# Altium PCB AC_board.PcbDoc (part 1 of 4)
Units mil, origin at the board's own origin, x right, y up, seen from the top; angles counter-clockwise.
Board outline 6299.21 x 4130.86 mil, 4 copper layers (Top Layer, Layer 1, Layer 2, Bottom Layer), stack 31.891 mil thick; 48 components, 40 nets, 187 pads, 6431 vias.
Unrouted connection lines stored in the file: 10.
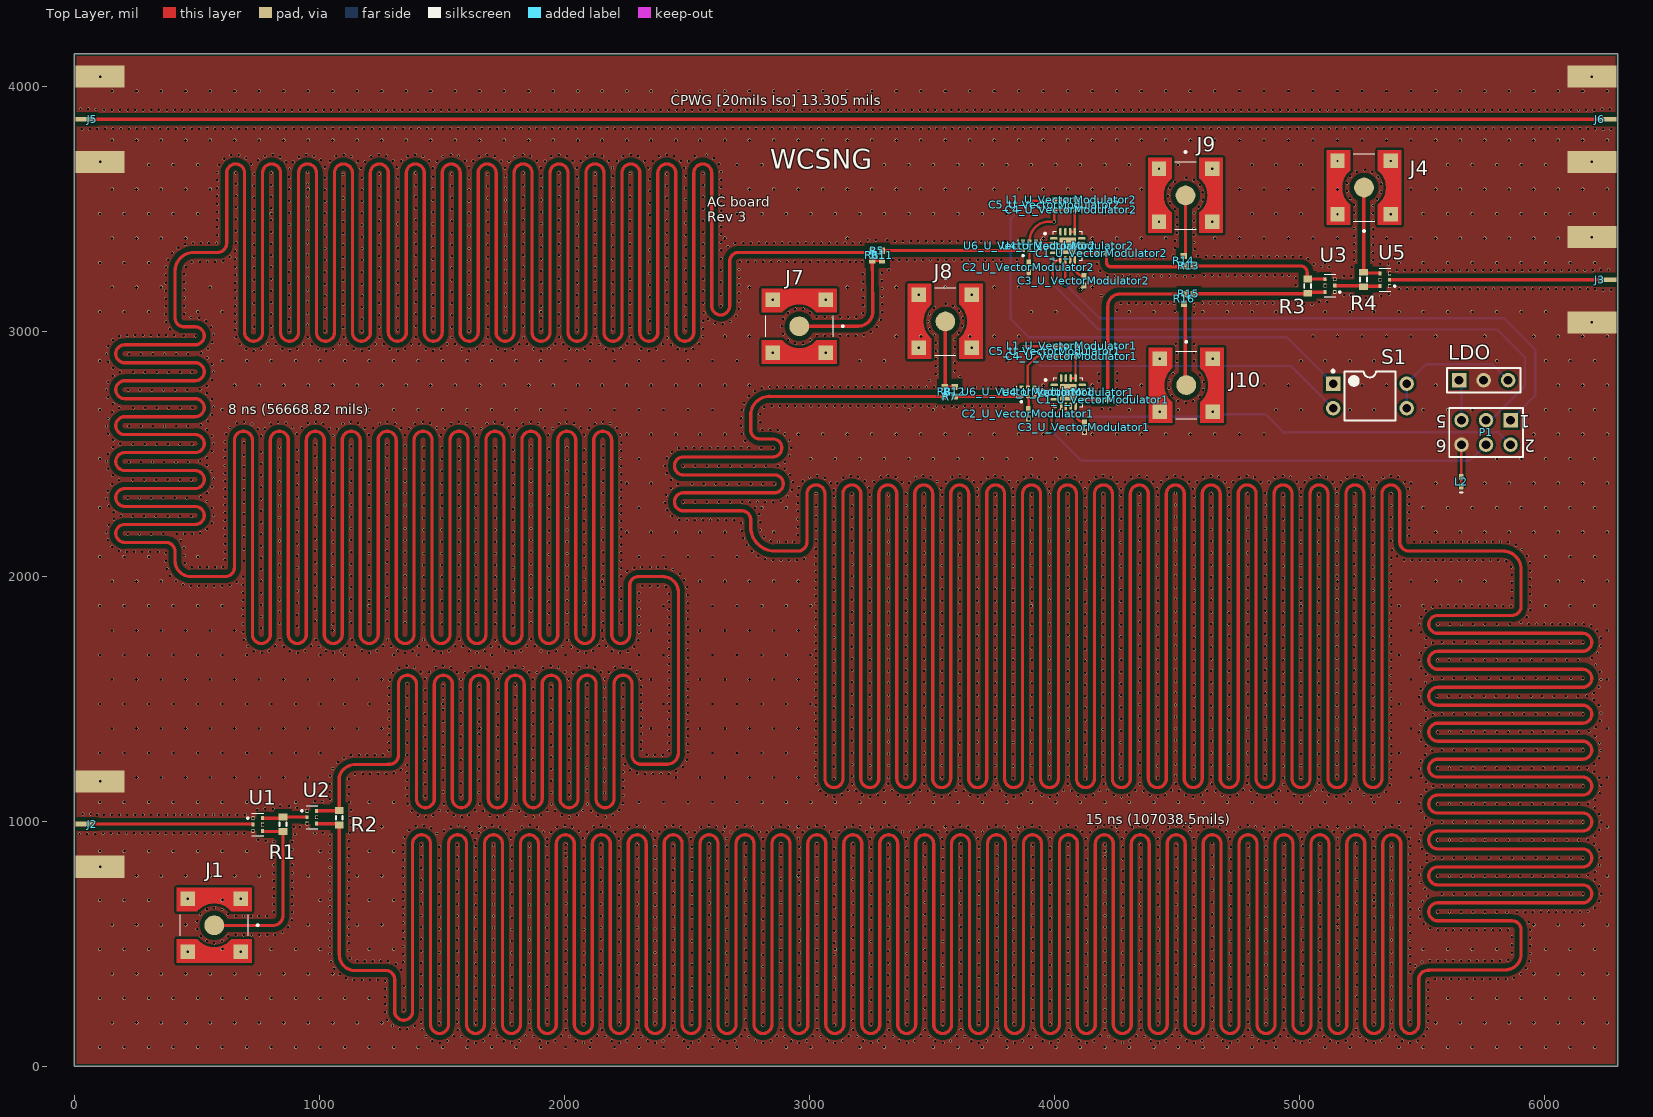
[diagram p0: Top Layer view]
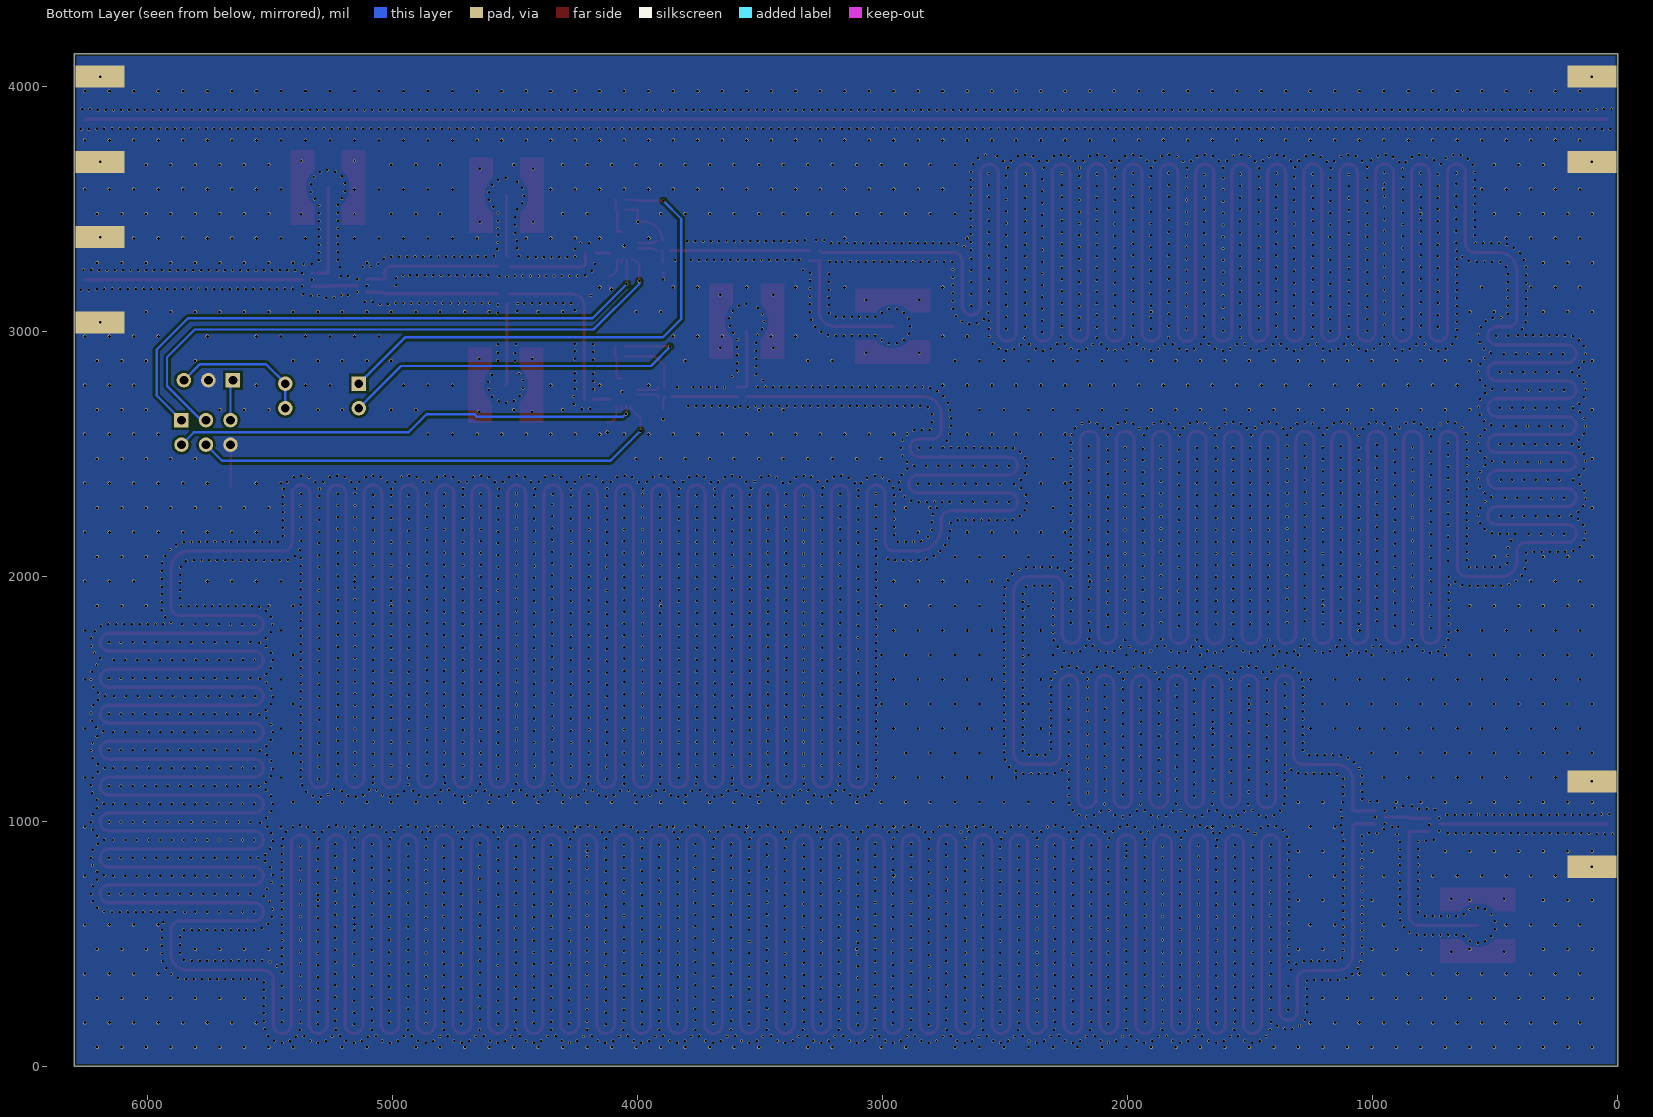
[diagram p1: Bottom Layer view, seen from below]
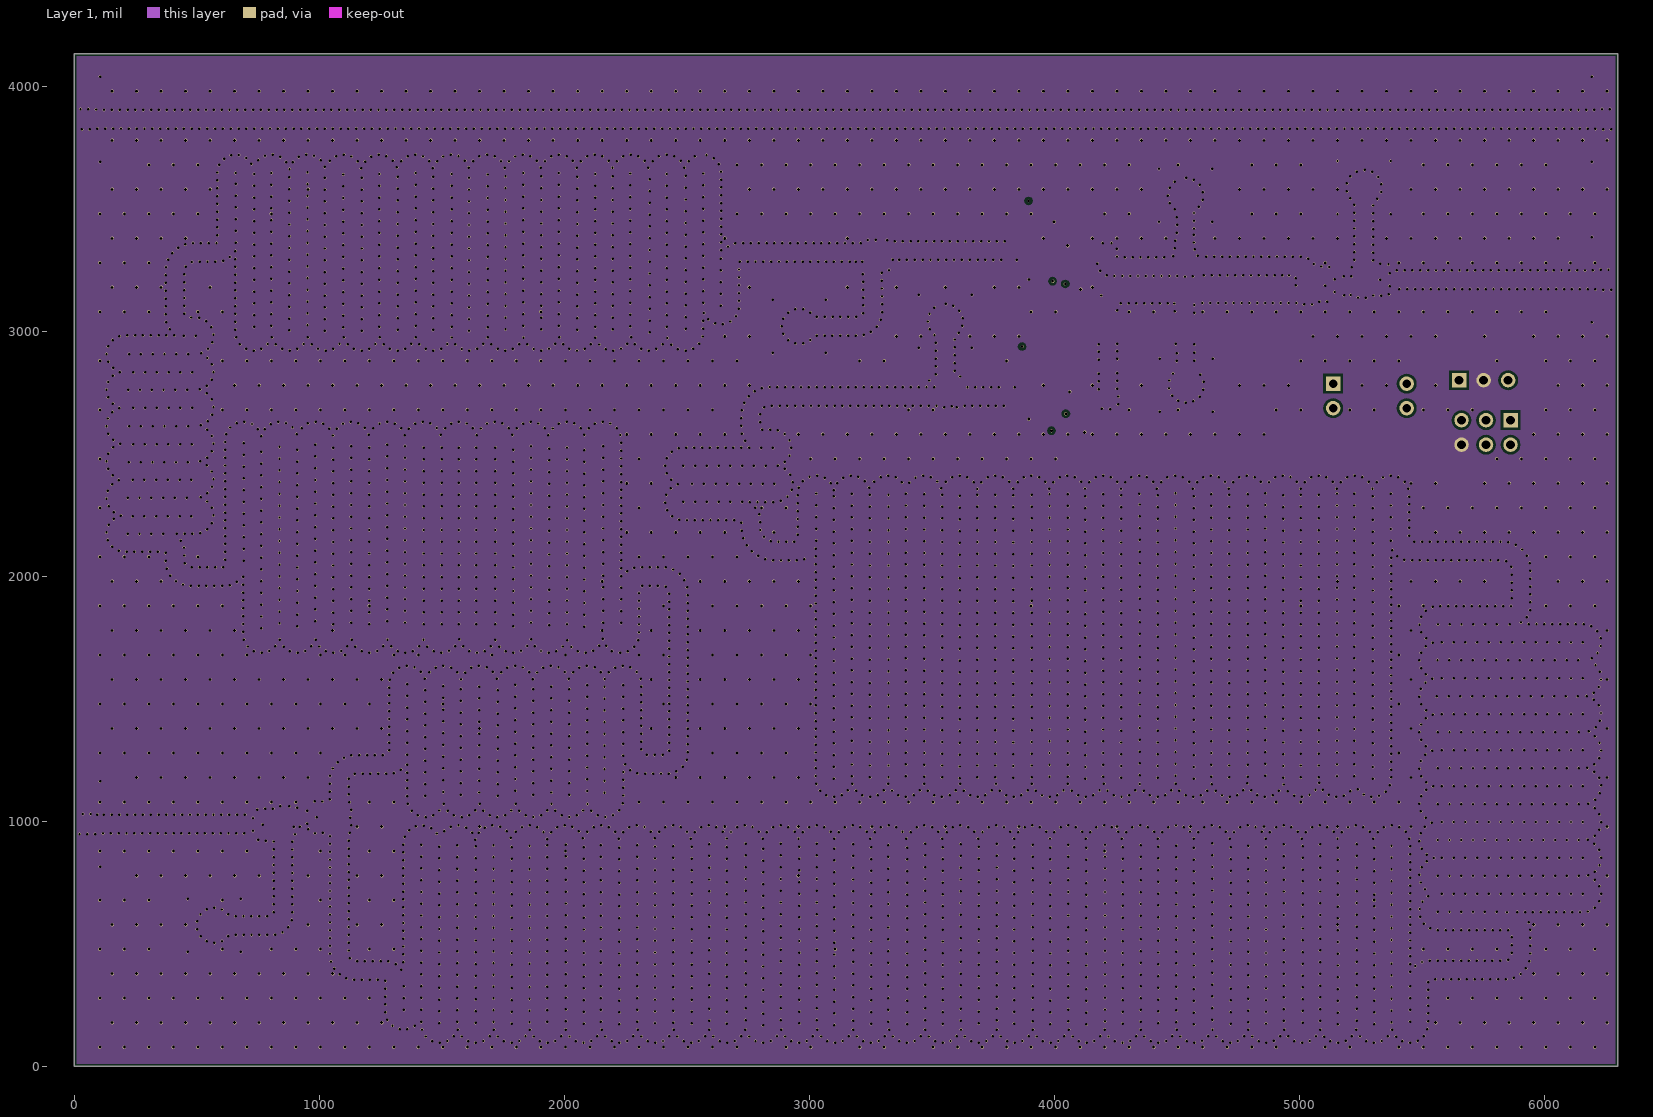
[diagram p2: Layer 1]
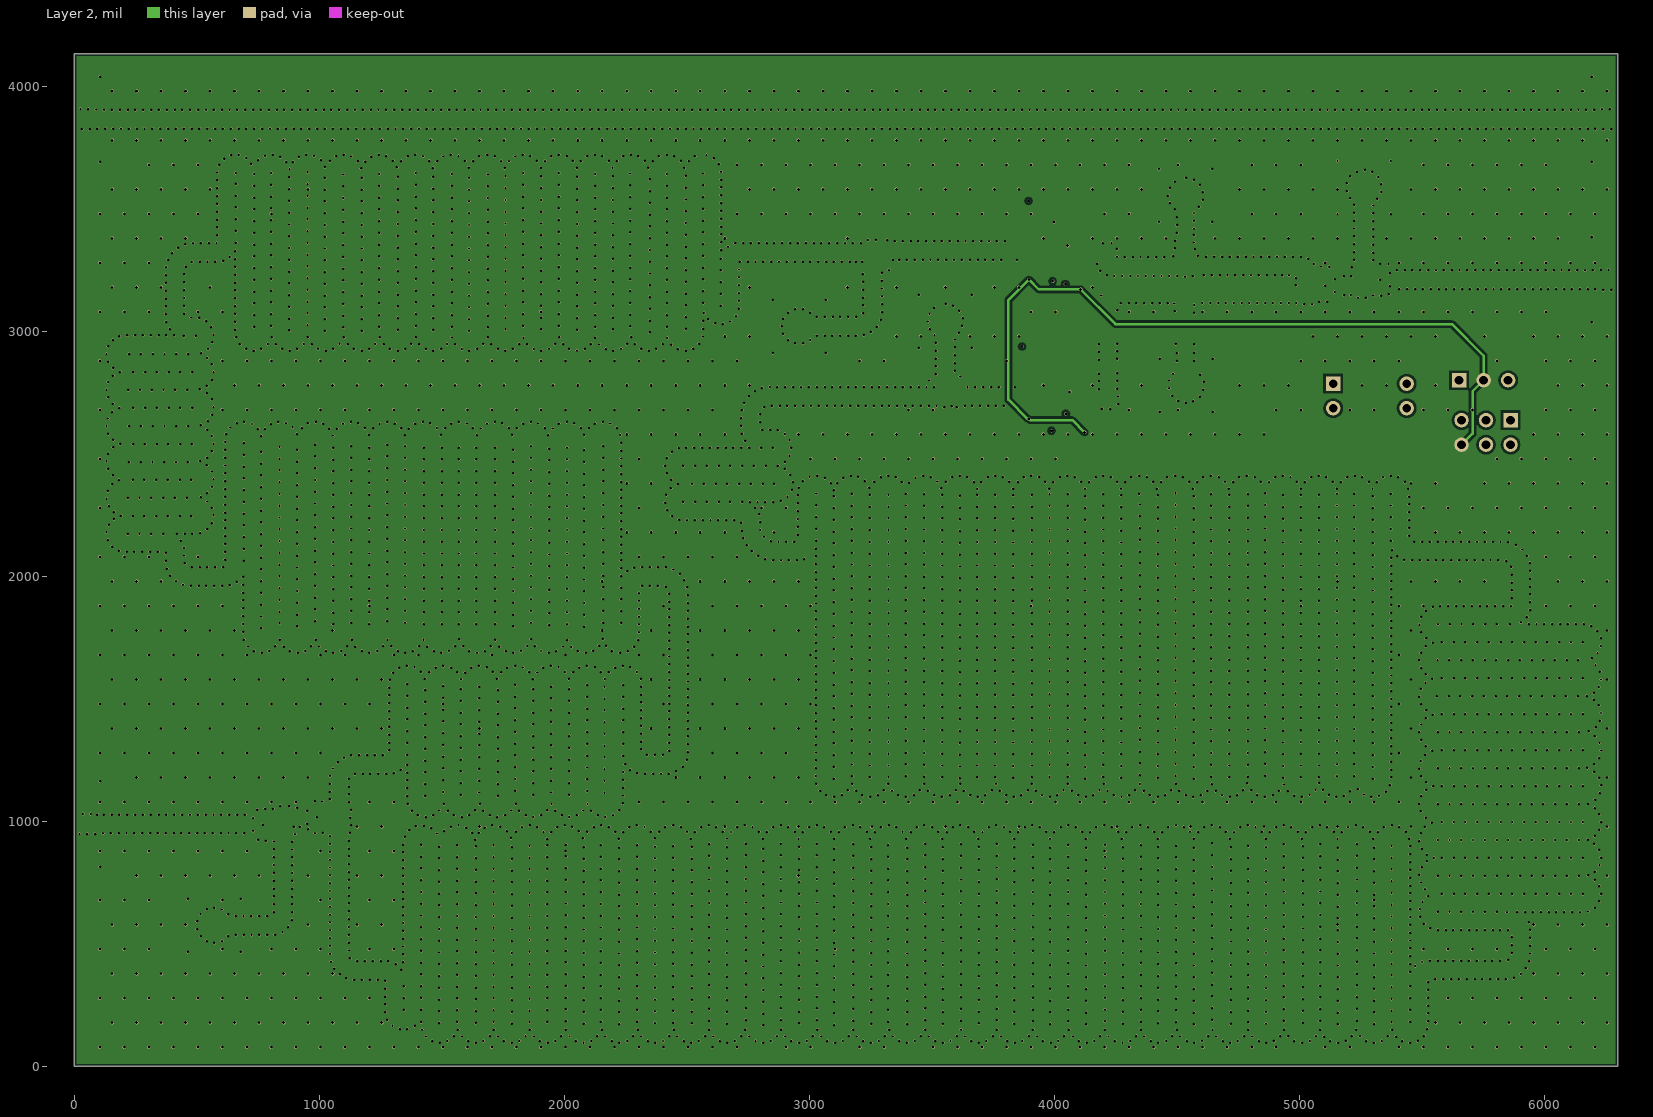
[diagram p3: Layer 2]

## Layer stack, top to bottom
Top Solder: solder mask 0.4, Solder Resist, Dk 3.5
Top Layer: signal copper 1.3778
Isola 408HR-1: prepreg 6.8898, FR4, Dk 3.64
Layer 1: signal copper 1.3778
Isola 408HR-Core: dielectric 12.6, FR-4, Dk 3.64
Layer 2: signal copper 1.3778
Isola 408HR-2: prepreg 6.8898, FR4, Dk 3.64
Bottom Layer: signal copper 1.3778
Bottom Solder: solder mask 0.4, Solder Resist, Dk 3.5

## Board outline
0,3 6299.21,3 6299.21,4133.86 0,4133.86

## Design rules (kind name [scope] priority, off if disabled: settings)
BoardOutlineClearance [All] p1: gap=10 ignorepadtopadclearanceinfootprint=FALSE
Clearance "Schematic Clearance Constraint" [InNetClass('RF Nets')] p1: gap=20 ignorepadtopadclearanceinfootprint=FALSE except(3: Arc-SMDPad Track-SMDPad SMDPad-SMDPad)
Clearance "Schematic Clearance Constraint_1" [InNetClass('HMC RF IN')] p2: gap=5 ignorepadtopadclearanceinfootprint=FALSE
Clearance "HMC RF IN Clearance" [InNetClass('HMC RF IN')] p3: gap=4.07 ignorepadtopadclearanceinfootprint=FALSE
Clearance [All] p4: gap=10 ignorepadtopadclearanceinfootprint=FALSE except(0: Arc-Hole Track-Hole SMDPad-Hole THPad-Hole Via-Hole Fill-Hole Poly-Hole Region-Hole Text-Hole; 6: Arc-Arc Arc-Track Arc-SMDPad Track-Track Track-SMDPad SMDPad-SMDPad)
Clearance "RF Clearance" [InNetClass('RF Nets')] p5: gap=10 ignorepadtopadclearanceinfootprint=FALSE
Length "Tap 2 Length" [InNet('No Net') And OnLayer('Top Layer')] p1: maxlimit=38652.77 minlimit=38652.77
Length "Tap 1 Length" [InNet('No Net') And OnLayer('Top Layer')] p2: maxlimit=24911.29 minlimit=24911.29
MatchedLengths [InNetClass('Taps')] p1: tolerance=0 checknetsindiffpair=FALSE checkdiffpairvsdiffpair=TRUE checkxsignals=TRUE checkothers=TRUE
MinimumSolderMaskSliver [All] p1: minsoldermaskwidth=0
PlaneConnect [All] p1: planeconnectstyle=Direct reliefexpansion=20 reliefentries=4 reliefconductorwidth=10 reliefairgap=10
PolygonConnect [All] p1: connectstyle=Direct reliefconductorwidth=10 reliefentries=4 polygonreliefangle="90 Angle" airgapwidth=10
RoomDefinition U_VectorModulator1 [InComponentClass('U_VectorModulator1')] p1: confinementstyle=ConfineIn formatcopy=TRUE lockcomponents=FALSE outline 3793.26,2541.83 4258.65,2541.83 4258.65,2987.83 3793.26,2987.83
RoomDefinition U_VectorModulator2 [InComponentClass('U_VectorModulator2')] p2: confinementstyle=ConfineIn formatcopy=TRUE lockcomponents=FALSE outline 3819.06,3158.2 4249.06,3158.2 4249.06,3583.2 3819.06,3583.2
RoutingVias [All] p1: holewidth=12 width=14 viastyle="Through Hole" minholewidth=8 minwidth=10 maxholewidth=17 maxwidth=20
ShortCircuit [All] p1: allowed=TRUE
SilkToSolderMaskClearance [IsPad] p1: minsilkscreentomaskgap=5 clearancetoexposedcopper=TRUE
SolderMaskExpansion [All] p1: expansion=4 istentingtop=FALSE
Width "Schematic Width Constraint_1" [InNetClass('RF Nets')] p1: maxlimit=13.3 minlimit=13.3 preferedwidth=13.3
Width "Schematic Width Constraint" [InNetClass('HMC RF IN')] p2: maxlimit=10 minlimit=10 preferedwidth=10
Width "HMC RF IN Width" [InNetClass('HMC RF IN')] p3: maxlimit=10 minlimit=10 preferedwidth=10
Width "RF Width" [InNetClass('RF Nets')] p4: maxlimit=13.3 minlimit=13.3 preferedwidth=13.31
Width [All] p5: maxlimit=10 minlimit=10 preferedwidth=10
26 further rules are at their usual default settings.

## Classes and differential pairs
net class "HMC RF IN": HMCIN_U_VectorModulator1 HMCIN_U_VectorModulator2 HMCINbar_U_VectorModulator1 HMCINbar_U_VectorModulator2
net class "RF Nets": B-IP B-OP NetC1_U_VectorModulator1_1 NetC1_U_VectorModulator2_1 NetJ5_SIG NetJ7_C NetJ8_C RF-C1 RF-C1-1 RF-C1-2 RF-C2-1 RF-C2-2 RF-J9 RF-J10 RF-S1 RF-S2-1 RF-S2-2 RF-S3-1 RF-S3-2 RXin TXout
channel class VectorModulator: U_VectorModulator1 U_VectorModulator2
component class U_VectorModulator2: C1_U_VectorModulator2 C2_U_VectorModulator2 C3_U_VectorModulator2 C4_U_VectorModulator2 C5_U_VectorModulator2 L1_U_VectorModulator2 U4_U_VectorModulator2 U6_U_VectorModulator2
component class U_VectorModulator1: C1_U_VectorModulator1 C2_U_VectorModulator1 C3_U_VectorModulator1 C4_U_VectorModulator1 C5_U_VectorModulator1 L1_U_VectorModulator1 U4_U_VectorModulator1 U6_U_VectorModulator1
component class AC_board: J1 J2 J3 J4 J5 J6 J7 J8 J9 J10 L2 LDO P1 R1 R2 R3 R4 R5 R6 R7 R8 R11 R12 R15 R16 S1 U1 U2 U3 U5

## Components (designator, comment, footprint, x,y, rotation, side; value= is the part's Value field where it differs from the comment)
C1_U_VectorModulator1 "Cap Semi" 0402 4198.83,2723.2 r0 top value=5pF (schematic designator C1)
C1_U_VectorModulator2 "Cap Semi" 0402 4193.31,3321 r0 top value=5pF (schematic designator C1)
C2_U_VectorModulator1 "Cap Semi" 0402 3893.4,2665.76 r90 top value=100pF (schematic designator C2)
C2_U_VectorModulator2 "Cap Semi" 0402 3895.31,3262.68 r90 top value=100pF (schematic designator C2)
C3_U_VectorModulator1 "Cap Semi" 0402 4122.65,2610.45 r90 top value=100pF (schematic designator C3)
C3_U_VectorModulator2 "Cap Semi" 0402 4120.31,3207.68 r90 top value=100pF (schematic designator C3)
C4_U_VectorModulator1 "Cap Semi" 0402 4071.65,2900.76 r0 top value=4.7uF (schematic designator C4)
C4_U_VectorModulator2 "Cap Semi" 0402 4069.31,3498 r0 top value=4.7uF (schematic designator C4)
C5_U_VectorModulator1 "Cap Semi" 0402 4002.65,2920.45 r90 top value=100pF (schematic designator C5)
C5_U_VectorModulator2 "Cap Semi" 0402 4000.31,3517.68 r90 top value=100pF (schematic designator C5)
J1 "CONSMA001-SMD-G" *LINX_CONSMA001-SMD-G_CONSMA001-SMD-G(Primary) 572,578 r270 top
J2 "SMA 50 Ohm edge" "SMA-OSHPARK-4L-1.6MM- ALT3" 5,991 r0 top
J3 "SMA 50 Ohm edge" "SMA-OSHPARK-4L-1.6MM- ALT3" 6294.21,3212 r180 top
J4 "CONSMA001-SMD-G" *LINX_CONSMA001-SMD-G_CONSMA001-SMD-G(Primary) 5263.3,3588.31 r180 top
J5 "SMA 50 Ohm edge" "SMA-OSHPARK-4L-1.6MM- ALT3" 5,3866.99 r0 top
J6 "SMA 50 Ohm edge" "SMA-OSHPARK-4L-1.6MM- ALT3" 6294.21,3866.99 r180 top
J7 "CONSMA001-SMD-G" *LINX_CONSMA001-SMD-G_CONSMA001-SMD-G(Primary) 2959,3022 r270 top
J8 "CONSMA001-SMD-G" *LINX_CONSMA001-SMD-G_CONSMA001-SMD-G(Primary) 3555,3042 r0 top
J9 "CONSMA001-SMD-G" *LINX_CONSMA001-SMD-G_CONSMA001-SMD-G(Primary) 4535,3556.02 r0 top
J10 "CONSMA001-SMD-G" *LINX_CONSMA001-SMD-G_CONSMA001-SMD-G(Primary) 4538,2782 r0 top
L1_U_VectorModulator1 "Inductor" 0402-A 4071.65,2941.76 r0 top value=0.33uH (schematic designator L1)
L1_U_VectorModulator2 "Inductor" 0402-A 4069.31,3539 r0 top value=0.33uH (schematic designator L1)
L2 "Inductor" 0402-A 5660,2388 r90 top value=10mH
LDO "Header 3" HDR1X3 5651,2802 r0 top (schematic designator P2)
P1 "Header 3X2" HDR2X3 5861,2639 r180 top
R1 "Res3" J1-0603 852.51,990 r90 top value=100
R2 "Res3" J1-0603 1082,1017 r270 top value=100
R3 "Res3" J1-0603 5033,3186 r270 top value=100
R4 "Res3" J1-0603 5261.22,3213 r270 top value=100
R5 "CRCW04020000Z0ED" RESC1005X40X25ML05T05 3276.83,3330.83 r0 top
R6 "CRCW04020000Z0ED" RESC1005X40X25ML05T05 3256.65,3311.17 r270 top
R7 "CRCW04020000Z0ED" RESC1005X40X25ML05T05 3573.17,2735.35 r0 top
R8 "CRCW04020000Z0ED" RESC1005X40X25ML05T05 3553,2755 r90 top
R11 "CRCW04020000Z0ED" RESC1005X40X25ML05T05 3296.65,3311.17 r90 top
R12 "CRCW04020000Z0ED" RESC1005X40X25ML05T05 3593,2755 r270 top
R13 "CRCW04020000Z0ED" RESC1005X40X25ML05T05 4548,3268.17 r0 top
R14 "CRCW04020000Z0ED" RESC1005X40X25ML05T05 4528,3289.17 r90 top
R15 "CRCW04020000Z0ED" RESC1005X40X25ML05T05 4549,3154 r0 top
R16 "CRCW04020000Z0ED" RESC1005X40X25ML05T05 4529,3134 r270 top
S1 "SW DIP-2" DIP-4 5287,2738 r0 top
U1 "Anaren PD0810J5050S2HF" *ANAREN_PD0409J7575S2HF 749.51,989 r0 top
U2 "Anaren PD0810J5050S2HF" *ANAREN_PD0409J7575S2HF 970.29,1019 r0 top
U3 "Anaren PD0810J5050S2HF" *ANAREN_PD0409J7575S2HF 5124,3188 r180 top
U4_U_VectorModulator1 "HMC630" *QFN50P300X300X100-17N 4056.55,2753.68 r0 top (schematic designator U4)
U4_U_VectorModulator2 "HMC630" *QFN50P300X300X100-17N 4054.21,3350.91 r0 top (schematic designator U4)
U5 "Anaren PD0810J5050S2HF" *ANAREN_PD0409J7575S2HF 5348,3212 r180 top
U6_U_VectorModulator1 "ANAREN_BD0810J50100AHF" *ANAREN_PD0409J7575S2HF 3891.98,2754.51 r90 top (schematic designator U6)
U6_U_VectorModulator2 "ANAREN_BD0810J50100AHF" *ANAREN_PD0409J7575S2HF 3898.31,3351 r90 top (schematic designator U6)

## Footprints (in the part's own frame and the unit in brackets; to place one, negate y for a bottom-side part, rotate by r counter-clockwise, add the part's x,y. Pads: shape width x height; smd on the part's side, far side on the other; paste and mask are expansions set on the pad)
0402 [mm] "Chip Capacitor, Body 1.0x0.5mm, IPC High Density"
  rect 0.6x0.5 smd: 1(-0.5,0) 2(0.5,0)
  body extent -0.55,-0.3 0.55,0.3, height 1.3
0402-A [mm] "Chip Inductor, Body 1.0x0.5mm, IPC High Density"
  rect 0.6x0.5 smd: 1(-0.5,0) 2(0.5,0)
  silkscreen extent -1.1,-0.15 -1.1,0.15, body extent -0.55,-0.3 0.55,0.3, height 0.55
*ANAREN_PD0409J7575S2HF [mm]
  rect 0.33x0.41 smd: 1(-0.495,0.66) 2(-0.495,0) 3(-0.495,-0.66) 4(0.495,-0.66) 5(0.495,0) 6(0.495,0.66)
  silkscreen extent -1.05,-1.17 0.6,1.17
*LINX_CONSMA001-SMD-G_CONSMA001-SMD-G(Primary) [mm]
  round 2.05 smd: C(0,0)
  rect 1.5x1.5 smd: G1(-2.75,2.75) G2(-2.75,-2.75) G3(2.75,-2.75) G4(2.75,2.75)
  Top Layer region: 1.44,-3.88 1.44,-1.76 1.54,-1.68 1.573,-1.651 1.663,-1.56 1.747,-1.465 1.827,-1.365 1.9,-1.26 1.968,-1.152 2.029,-1.04 2.085,-0.925 2.133,-0.807 2.175,-0.686 2.21,-0.564 2.239,-0.439 2.26,-0.313 2.274,-0.186 2.281,-0.059 2.281,0.069 2.274,0.196 2.26,0.323 2.239,0.449 2.21,0.574 2.175,0.696 2.133,0.817 2.085,0.935 2.029,1.05 1.968,1.162 1.9,1.27 1.827,1.375 1.747,1.475 1.663,1.57 1.573,1.661 1.54,1.69 1.44,1.76 1.44,3.88 3.88,3.88 3.88,-3.88 1.44,-3.88
  Top Layer region: -1.44,3.88 -1.44,1.76 -1.54,1.68 -1.6,1.624 -1.687,1.534 -1.769,1.439 -1.845,1.34 -1.916,1.237 -1.981,1.13 -2.04,1.02 -2.093,0.907 -2.139,0.791 -2.18,0.672 -2.213,0.552 -2.241,0.43 -2.261,0.307 -2.275,0.182 -2.281,0.058 -2.281,-0.067 -2.275,-0.192 -2.261,-0.317 -2.241,-0.44 -2.213,-0.562 -2.18,-0.682 -2.139,-0.801 -2.093,-0.917 -2.04,-1.03 -1.981,-1.14 -1.916,-1.247 -1.845,-1.35 -1.769,-1.449 -1.687,-1.544 -1.6,-1.634 -1.54,-1.69 -1.44,-1.76 -1.44,-3.88 -3.88,-3.88 -3.88,3.88 -1.44,3.88
  silkscreen extent -1.1,-3.5 1.1,4.6
*QFN50P300X300X100-17N [mm]
  oval 0.8x0.26 smd: 1(-1.455,0.75) 2(-1.455,0.25) 3(-1.455,-0.25) 4(-1.455,-0.75) 9(1.455,-0.75) 10(1.455,-0.25) 11(1.455,0.25) 12(1.455,0.75)
  oval 0.26x0.8 smd: 5(-0.75,-1.455) 6(-0.25,-1.455) 7(0.25,-1.455) 8(0.75,-1.455) 13(0.75,1.455) 14(0.25,1.455) 15(-0.25,1.455) 16(-0.75,1.455)
  rect 1.7x1.7 smd: 17(0,0)
  silkscreen extent -2.45,-1.5 1.5,1.5
DIP-4 [mm] "DIP; 4 Leads; Row Spacing 7.62 mm; Pitch 2.54 mm"
  rect 1.5x1.5 hole 0.9: 1(-3.81,1.27)
  round 1.5 hole 0.9: 2(-3.81,-1.27) 3(3.81,-1.27) 4(3.81,1.27)
  silkscreen extent -3.93,-2.55 2.65,2.69, body extent -3.15,-2.5 3.15,2.5, height 5.6
HDR1X3 [mm] "Connector; Header; 3 Position"
  rect 1.5x1.5 hole 0.9: 1(0,0)
  round 1.5 hole 0.9: 2(2.54,0) 3(5.08,0)
  silkscreen extent -1.27,-1.27 6.35,1.27
HDR2X3 [mm] "Connector; Header; 3x2 Position"
  rect 1.5x1.5 hole 0.9: 1(0,0)
  round 1.5 hole 0.9: 2(0,2.54) 3(2.54,0) 4(2.54,2.54) 5(5.08,0) 6(5.08,2.54)
  silkscreen extent -1.27,-1.27 6.35,3.81
J1-0603 [mm] "Chip Resistor, Body 1.6x0.8mm, IPC High Density"
  rect 0.7x0.9 smd: 1(-0.75,0) 2(0.75,0)
  silkscreen extent -0.2,-0.35 0.2,0.35, body extent -0.85,-0.48 0.85,0.48, height 0.9
RESC1005X40X25ML05T05 [mm] "Chip Resistor, 2-Leads, Body 1.00x0.50mm, IPC Low Density"
  rect 0.65x0.65 smd: 1(-0.5,0) 2(0.5,0)
  body extent -0.53,-0.27 0.53,0.28, height 0.4
"SMA-OSHPARK-4L-1.6MM- ALT3" [mil] "Short and thin signal pin"
  rect 200x90 smd: GND(101,-174) GND(101,174)
  rect 200x90 smd far side: GND(101,-174) GND(101,174)
  rect 75x20 smd: SIG(38.5,0)

## Part data
C1_U_VectorModulator1 C1_U_VectorModulator2 C2_U_VectorModulator1 C2_U_VectorModulator2 C3_U_VectorModulator1 C3_U_VectorModulator2 C4_U_VectorModulator1 C4_U_VectorModulator2 C5_U_VectorModulator1 C5_U_VectorModulator2: "Capacitor (Semiconductor SIM Model)", LatestRevisionDate=29-May-2009, LatestRevisionNote="IPC-7351 Footprint Added.", PackageDescription="Chip Capacitor", PackageReference=C1206, Published=8-Jun-2000, Publisher="Altium Limited"
J1 J4: "50 Ohm Gold Plated Female PCB Mount SMA Connector", Package=None, Supplier Part Number 1=CONSMA001-SMD-G-ND, Digi-Key_Part_Number=CONSMA001-SMD-G-ND, Digi-Key_Purchase_URL=https://www.digikey.com/product-detail/en/linx-technologies-inc/CONSMA001-SMD-G/CONSMA001-SMD-G-ND/4496569?utm_source=snapeda&utm_medium=aggregator&utm_campaign=symbol, MF="Linx Technologies", MP=CONSMA001-SMD-G, SnapEDA_Link=https://www.snapeda.com/parts/CONSMA001-SMD-G/Linx%20Technologies%20Inc./view-part/?ref=snap, Supplier 1=Digi-Key
J2 J3 J5 J6: library part SMA-OSHPARK-4L-1.6MM-ALT3, Package=SMA-OSHPARK-4L-1.6MM, Supplier Part Number 1=J658-ND, DeviceName=-OSHPARK-4L-1.6MM, DeviceSetName=SMA, GateName_1=G1, LibraryName=dword1511-connectors, Supplier 1=Digi-Key, SymbolName_1=COAX
J7 J8 J9 J10: "50 Ohm Gold Plated Female PCB Mount SMA Connector", Package=None, Digi-Key_Part_Number=CONSMA001-SMD-G-ND, Digi-Key_Purchase_URL=https://www.digikey.com/product-detail/en/linx-technologies-inc/CONSMA001-SMD-G/CONSMA001-SMD-G-ND/4496569?utm_source=snapeda&utm_medium=aggregator&utm_campaign=symbol, MF="Linx Technologies", MP=CONSMA001-SMD-G, SnapEDA_Link=https://www.snapeda.com/parts/CONSMA001-SMD-G/Linx%20Technologies%20Inc./view-part/?ref=snap
LDO: "Header, 3-Pin", LatestRevisionDate=17-Jul-2002, LatestRevisionNote="Re-released for DXP Platform.", Publisher="Altium Limited"
P1: "Header, 3-Pin, Dual row", LatestRevisionDate=17-Jul-2002, LatestRevisionNote="Re-released for DXP Platform.", Publisher="Altium Limited"
R1 R2 R3 R4: "Resistor", LatestRevisionDate=29-May-2009, LatestRevisionNote="IPC-7351 Footprint Added.", PackageDescription="Chip Resistor", PackageReference=J1-0603, Published=8-Jun-2000, Publisher="Altium Limited"
R5 R6 R7 R8 R11 R12 R13 R14 R15 R16: library part CMP-2002-08122-1, Manufacturer="Vishay Dale", Part Number=CRCW04020000Z0ED
S1: "DIP Switch, 2 Position, SPST", LatestRevisionDate=17-Jul-2002, LatestRevisionNote="Re-released for DXP Platform.", PackageReference=DIP-4, Published=24-Mar-1999, Publisher="Altium Limited"
U1 U2 U3 U5: Supplier Part Number 1=1173-1093-1-ND, Supplier 1=Digi-Key, U*=1173-1093-1-ND
U4_U_VectorModulator1 U4_U_VectorModulator2: Supplier Part Number 1=1127-1497-ND, Supplier 1=Digi-Key
U6_U_VectorModulator1 U6_U_VectorModulator2: Supplier Part Number 1=1173-1056-1-ND, Supplier 1=Digi-Key
L1_U_VectorModulator1 L1_U_VectorModulator2 L2: Code_IEC=1005, Code_JEITA=0402, LatestRevisionDate=29-May-2009, LatestRevisionNote="IPC-7351 Footprint Added.", PackageDescription="Chip Inductor", PackageReference=0402-A, Published=8-Jun-2000, Publisher="Altium Limited"

## Via types
v1: diameter 12/12/12/12 (per signal layer), hole 10, Top Layer to Bottom Layer, 5510 vias
v2: diameter 14/14/14/14 (per signal layer), hole 12, Top Layer to Bottom Layer, 919 vias
v3: diameter 15/15/15/15 (per signal layer), hole 12, Top Layer to Bottom Layer, 2 vias

## Nets (pads, with @x,y where several pads share a name; then routed paths per layer and width w, separated by ;. In a path a pad name is that pad's centre, name@x,y a point inside that pad or via, vN(x,y) a via of type N, cw(c..) or ccw(c..) an arc to the next point about the centre after c; other vN are vias at no path point)
8V: LDO.3 S1.3 S1.4 | length 574.5
  Bottom Layer w10: S1.3@5437,2688 S1.4@5437,2788 5517,2868 5785,2868 LDO.3@5851,2802
8V1: C5_U_VectorModulator2.2 L1_U_VectorModulator2.1 S1.1 | length 2094.3
  Top Layer w10: v2(3894.31,3533.37) 3895.08,3534.14 3997.08,3534.14 C5_U_VectorModulator2.2@4000.31,3537.37 4045.69,3537.37 L1_U_VectorModulator2.1@4049.63,3541.31
  Bottom Layer w10: v2(3894.31,3533.37) 3822,3461.06 3822,3052 3897.5,2976.5 4948.5,2976.5 S1.1@5137,2788
8V2: C5_U_VectorModulator1.2 L1_U_VectorModulator1.1 S1.2 | length 1558.5
  Top Layer w10: v2(3867.98,2939.51) 3868.3,2939.82 4002.34,2939.82 C5_U_VectorModulator1.2@4002.65,2940.13 4003.46,2940.95 4051.15,2940.95 L1_U_VectorModulator1.1@4051.96,2941.76
  Bottom Layer w10: v2@3867.24,2938.76 3946,2860 4965,2860 S1.2@5137,2688
AGND: C2_U_VectorModulator1.1 C2_U_VectorModulator2.1 C3_U_VectorModulator1.1 C3_U_VectorModulator2.1 C4_U_VectorModulator1.1 C4_U_VectorModulator2.1 C5_U_VectorModulator1.1 C5_U_VectorModulator2.1 J1.G1 J1.G2 J1.G3 J1.G4 J2.GND J3.GND J4.G1 J4.G2 J4.G3 J4.G4 J5.GND J6.GND J7.G1 J7.G2 J7.G3 J7.G4 J8.G1 J8.G2 J8.G3 J8.G4 J9.G1 J9.G2 J9.G3 J9.G4 J10.G1 J10.G2 J10.G3 J10.G4 L2.1 L2.2 LDO.2 P1.6 U1.1 U1.3 U1.5 U2.1 U2.3 U2.5 U3.1 U3.3 U3.5 U4_U_VectorModulator1.17 U4_U_VectorModulator2.17 U5.1 U5.3 U5.5 U6_U_VectorModulator1.5 U6_U_VectorModulator2.5 | length 4001.3
  Top Layer w10: U6_U_VectorModulator1.5@3891.4,2774 3891.4,2818.18 3891.39,2860.89 3931.26,2900.76 C5_U_VectorModulator1.1@4002.65,2900.76 C4_U_VectorModulator1.1@4051.96,2900.76 ; v2(3895.25,2643.36) cw(c3897.65,2643.36) C2_U_VectorModulator1.1@3897.65,2645.76 ; v2@3895.31,3214.5 C2_U_VectorModulator2.1@3895.31,3243 ; U6_U_VectorModulator2.5@3898.31,3370.49 cw(c3976.46,3370.49) 3976.46,3448.63 v2(3998.43,3448.63) 3998.43,3496.11 cw(c4000.31,3496.11) C5_U_VectorModulator2.1@4000.31,3498 C4_U_VectorModulator2.1@4049.63,3498 ; v2@4105.33,3173.02 C3_U_VectorModulator2.1@4120.31,3188 ; L2.1@5660,2368.32 L2.2@5660,2407.69 5660.5,2408.19 5660.5,2538.5 P1.6@5661,2539
  Layer 2 w10: v2(3895.25,2643.36) 3894.48,2644.13 3890.87,2644.13 3812,2723 3812,3129.06 v2(3895.98,3213.04) 3936.26,3172.76 v2(4107.2,3172.76) 4248.96,3031 5622,3031 5751,2902 LDO.2@5751,2802 5706,2757 5706,2584 P1.6@5661,2539 ; v2@3900.69,2639 4073.61,2639 v2(4123.25,2589.36)